# Altium PCB IRAUPS3.PcbDoc
Units mm, origin at the board's own origin, x right, y up, seen from the top; angles counter-clockwise.
Board outline 106 x 85.5 mm, 2 copper layers (Top Layer, Bottom Layer); 70 components, 43 nets, 167 pads, 0 vias.
Unrouted connection lines stored in the file: 123.
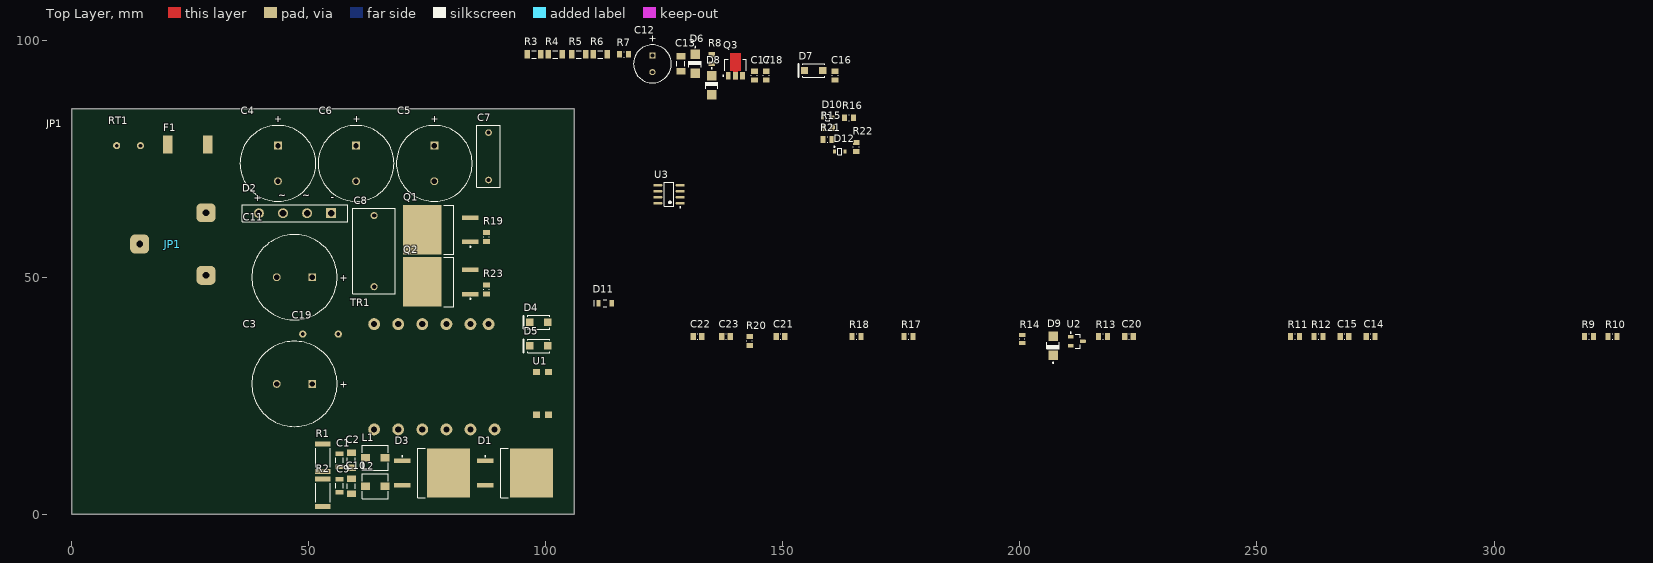
[diagram p0: Top Layer view]
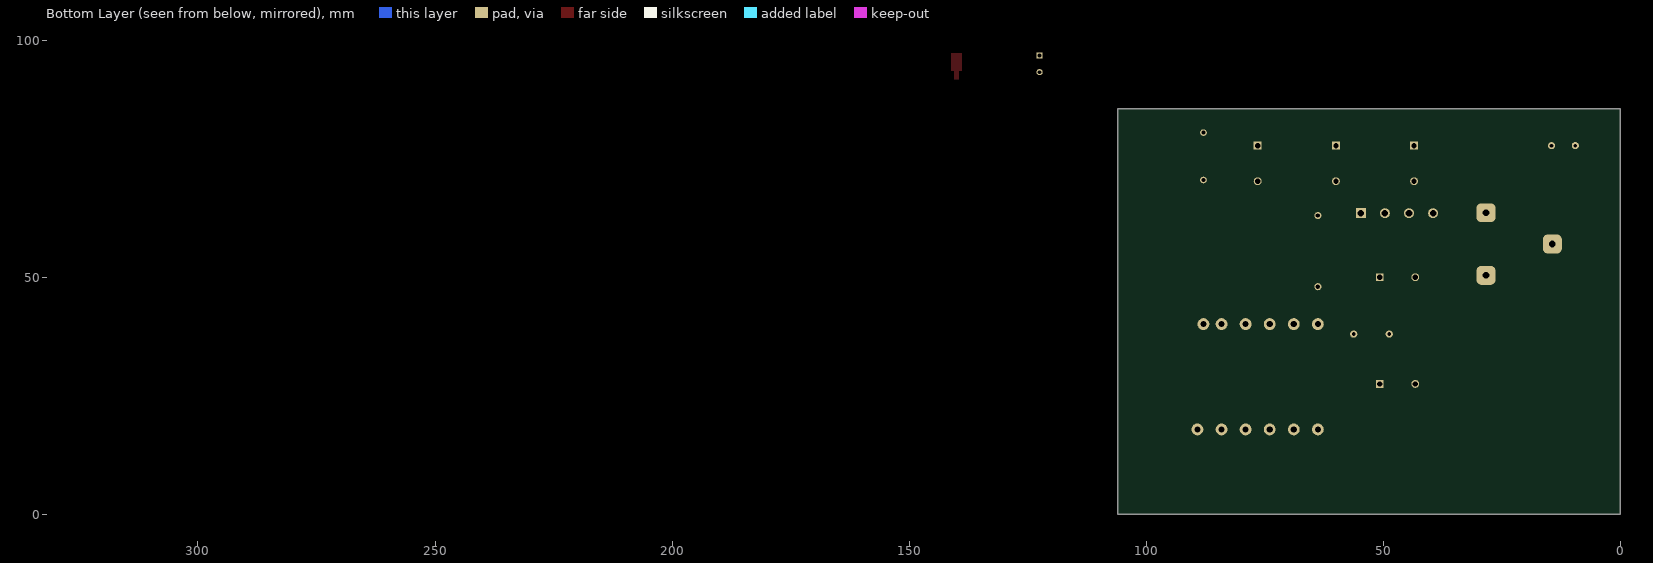
[diagram p1: Bottom Layer view, seen from below]

## Layer stack, top to bottom
Top Solder: solder mask 0.0102, Solder Resist, Dk 3.5
Top Layer: signal copper 0.0356
Dielectric 1: dielectric 0.32, FR-4, Dk 4.8
Bottom Layer: signal copper 0.0356
Bottom Solder: solder mask 0.0102, Solder Resist, Dk 3.5

## Board outline
0,0 0,85.5 106,85.5 106,0

## Design rules (kind name [scope] priority, off if disabled: settings)
Clearance [All] p1: gap=0.254 ignorepadtopadclearanceinfootprint=FALSE except(0: Arc-Hole Track-Hole SMDPad-Hole THPad-Hole Via-Hole Fill-Hole Poly-Hole Region-Hole Text-Hole)
Height [All] p1: minheight=0 maxheight=45 prefheight=12.7
PolygonConnect [All] p1: connectstyle=Relief reliefconductorwidth=0.254 reliefentries=4 polygonreliefangle="90 Angle" airgapwidth=0.254
RoutingVias [All] p1: holewidth=0.711 width=1.27 viastyle="Through Hole" minholewidth=0.711 minwidth=1.27 maxholewidth=0.711 maxwidth=1.27
SolderMaskExpansion [All] p1: expansion=0.102
Width [All] p1: maxlimit=0.254 minlimit=0.254 preferedwidth=0.254
29 further rules are at their usual default settings.

## Components (designator, comment, footprint, x,y, rotation, side; value= is the part's Value field where it differs from the comment)
C1 "CAP 1uF 100V 1206(3216)" CAPC1206(3216)190_L 56.5,11.4 r90 top value=1uF
C2 "CAP 100nF 100V 1206(3216)" CAPC1206(3216)150_M 59,11.4 r90 top value=100nF
C3 "35 Vdc, 4.7 mF" WCAP-ATG8_18x35.5x7.5 47,27.5 r0 top value="4.7 mF"
C4 "860241480001" WCAP-AT1H_16x35.5x7.5 43.5,74 r90 top value=100uF
C5 "860241480001" WCAP-AT1H_16x35.5x7.5 76.5,74 r90 top value=100uF
C6 "860241480001" WCAP-AT1H_16x35.5x7.5 60,74 r90 top value=100uF
C7 "400V DC, 100 nF" WCAP-FTBE_13x5x11 87.93,75.5 r90 top value="100 nF"
C8 "B32672L1223J000" CAP_RM15_W9L18 63.8,55.5 r270 top value=22nF
C9 "CAP 1uF 100V 1206(3216)" CAPC1206(3216)190_L 56.5,6 r90 top value=1uF
C10 "CAP 100nF 100V 1206(3216)" CAPC1206(3216)150_M 59,5.9 r90 top value=100nF
C11 "35 Vdc, 4.7 mF" WCAP-ATG8_18x35.5x7.5 47,50 r0 top value="4.7 mF"
C12 "860240474005" WCAP-AT1H_8x11.5x3.5 122.5,95 r90 top value=100uF
C13 "CAP 100nF 100V 1206(3216)" CAPC1206(3216)150_M 128.5,95 r90 top value=100nF
C14 "CAP 100nF 25V 0805(2012)" CAPC0805(2012)100_N 273.999,37.5 r0 top value=100nF
C15 "CAP 100nF 25V 0805(2012)" CAPC0805(2012)100_N 268.499,37.5 r0 top value=100nF
C16 "CAP 100nF 25V 0805(2012)" CAPC0805(2012)100_N 161.03,92.5 r90 top value=100nF
C17 "CAP 100nF 25V 0805(2012)" CAPC0805(2012)100_N 144,92.5 r90 top value=100nF
C18 "CAP 2.2uF 25V 0805(2012)" CAPC0805(2012)145_N 146.5,92.5 r90 top value=2.2uF
C19 "VY2472M49Y5US63V7" CAP_VY2472M49Y5US63V7 52.5,38 r0 top value=4700pF
C20 "CAP 1nF 25V 0805(2012)" CAPC0805(2012)100_N 222.999,37.5 r0 top value=1nF
C21 "CAP 470nF 25V 0805(2012)" CAPC0805(2012)100_N 149.5,37.5 r0 top value=470nF
C22 "CAP 2.2uF 25V 0805(2012)" CAPC0805(2012)145_N 132,37.5 r0 top value=2.2uF
C23 "CAP 2.2uF 25V 0805(2012)" CAPC0805(2012)145_N 138,37.5 r0 top value=2.2uF
D1 "STTH1002CG" TO-263_L 93.5,8.7 r0 top
D2 "GBU405" DIOD_BRIDGE_GBU 47.12,63.5 r180 top
D3 "STTH1002CG" TO-263_L 76,8.7 r0 top
D4 "ES1D" FAIR-SMA-2_V 98.5,40.5 r180 top
D5 "ES1D" FAIR-SMA-2_V 98.5,35.5 r180 top
D6 "1SMA5934BT3G" ONSC-SMA-2-403D-02_F_V 131.5,95 r270 top
D7 "ES1D" FAIR-SMA-2_V 156.5,93.6 r180 top
D8 "1SMA5927BT3G" ONSC-SMA-2-403D-02_F_V 135,90.5 r270 top
D9 "1SMA5927BT3G" ONSC-SMA-2-403D-02_F_V 206.999,35.5 r90 top
D10 "NSR0340HT1G" ONSC-SOD-323-2-477-02_V 159.5,83.65 r0 top
D11 "LL4148" DIOD-SOD-80 112.5,44.5 r180 top
D12 "NSR0340HT1G" ONSC-SOD-323-2-477-02_V 162,76.55 r0 top
F1 "UMT250" FUSE_UMT250 24.5,78 r180 top value=3.15A
JP1 "FN9226-3-02" CONN-FN9226-3-02 0,57 r0 top
L1 "744316560" "WE-HCI_5040_WE-PERM 2" 64,11.9 r270 top value=5.6uH
L2 "744316560" "WE-HCI_5040_WE-PERM 2" 64,5.9 r270 top value=5.6uH
Q1 "SIHB33N60EF-GE3" D2PAK_L 77.86,60 r180 top
Q2 "SIHB33N60EF-GE3" D2PAK_L 77.86,49 r180 top
Q3 "2SC5569-TD-E" ONSC-SOT-89-3-419AW_V 140,94.5 r0 top
R1 "2K2 5% 2512(6432)" RESC2512(6432)_L 53,11.9 r90 top value=2K2
R2 "2K2 5% 2512(6432)" RESC2512(6432)_L 53,4.5 r90 top value=2K2
R3 "100K 5% 1206(3216)" RESC1206(3216)_N 97.5,97 r180 top value=100K
R4 "100K 5% 1206(3216)" RESC1206(3216)_N 102,97 r180 top value=100K
R5 "100K 5% 1206(3216)" RESC1206(3216)_N 106.95,97 r180 top value=100K
R6 "100K 5% 1206(3216)" RESC1206(3216)_N 111.5,97 r180 top value=100K
R7 "27R 5% 0805(2012)" RESC0805(2012)_N 116.5,97 r0 top value=27R
R8 "10K 5% 0805(2012)" RESC0805(2012)_N 135,96.05 r90 top value=10K
R9 "10K 5% 0805(2012)" RESC0805(2012)_N 319.999,37.5 r0 top value=10K
R10 "47K 5% 0805(2012)" RESC0805(2012)_N 324.999,37.5 r0 top value=47K
R11 "4K7 5% 0805(2012)" RESC0805(2012)_N 257.999,37.5 r0 top value=4K7
R12 "27K 5% 0805(2012)" RESC0805(2012)_N 262.999,37.5 r0 top value=27K
R13 "2K7 5% 0805(2012)" RESC0805(2012)_N 217.499,37.5 r0 top value=2K7
R14 "1K5 5% 0805(2012)" RESC0805(2012)_L 200.499,37 r90 top value=1K5
R15 "22R 5% 0805(2012)" RESC0805(2012)_N 159.5,81.55 r0 top value=22R
R16 "6K2 1% 0805(2012)" RESC0805(2012)_N 164,83.65 r0 top value=6K2
R17 "6K2 1% 0805(2012)" RESC0805(2012)_N 176.5,37.5 r0 top value=6K2
R18 "10R 5% 0805(2012)" RESC0805(2012)_N 165.5,37.5 r0 top value=10R
R19 "4K7 5% 0805(2012)" RESC0805(2012)_N 87.5,58.5 r270 top value=4K7
R20 "16K 1% 0805(2012)" RESC0805(2012)_N 143,36.5 r90 top value=16K
R21 "22R 5% 0805(2012)" RESC0805(2012)_N 159.45,79.05 r0 top value=22R
R22 "10R 5% 0805(2012)" RESC0805(2012)_N 165.5,77.5 r90 top value=10R
R23 "4K7 5% 0805(2012)" RESC0805(2012)_N 87.5,47.45 r270 top value=4K7
RT1 "B57235S0509M000" RES_TH_9.5mm 12,77.75 r0 top
TR1 "019-7340-01R" TRAN_019-7340-01R 76.5,29 r270 top
U1 "LTV817S" SMD-4 99.295,25.5 r0 top
U2 "TL431" DBZ0003A_M 211.999,36.5 r0 top
U3 "IRS27952" SOIC8_L 126,67.5 r180 top

## Footprints (in the part's own frame and the unit in brackets; to place one, negate y for a bottom-side part, rotate by r counter-clockwise, add the part's x,y. Pads: shape width x height; smd on the part's side, far side on the other; paste and mask are expansions set on the pad)
CAP_RM15_W9L18 [mm] "CAP RM15 width 9, height 17.5, length 18"
  round 1.5 hole 0.9: 1(-7.5,0) 2(7.5,0)
  silkscreen extent -9,-4.5 9,4.5, body extent -9,-4.5 9,4.5, height 17.5
CAP_VY2472M49Y5US63V7 [mm] "X,Y CAP"
  round 1.524 hole 0.8: 1(-3.75,0) 2(3.75,0)
  body extent -6.35,-2.5 6.15,2.5, height 16.24
CAPC0805(2012)100_N [mm] "Chip Capacitor, Body 2.0x1.2mm, Height 1.0mm, IPC Medium Density"
  rect 1.15x1.45 smd: 1(-0.9,0) 2(0.9,0)
  silkscreen extent -0.05,-0.62 0.05,0.63, body extent -1.1,-0.72 1.1,0.73, height 1
CAPC0805(2012)145_N [mm] "Chip Capacitor, Body 2.0x1.2mm, Height 1.45mm, IPC Medium Density"
  rect 1.15x1.45 smd: 1(-0.9,0) 2(0.9,0)
  silkscreen extent -0.05,-0.62 0.05,0.63, body extent -1.1,-0.72 1.1,0.73, height 1.45
CAPC1206(3216)150_M [mm] "Chip Capacitor, Body 3.2x1.6mm, Height 1.5mm, IPC Low Density"
  rect 1.35x1.9 smd: 1(-1.6,0) 2(1.6,0)
  silkscreen extent -0.55,-0.85 0.55,0.85, body extent -1.7,-0.9 1.7,0.9, height 1.5
CAPC1206(3216)190_L [mm] "Chip Capacitor, Body 3.2x1.6mm, Height 1.9mm, IPC High Density"
  rect 0.95x1.7 smd: 1(-1.4,0) 2(1.4,0)
  silkscreen extent -0.55,-0.75 0.55,0.75, body extent -1.7,-0.9 1.7,0.9, height 1.9
CONN-FN9226-3-02 [mm] "IEC Inlet"
  rrect50% 4x4 hole 1.4: L(28.35,-6.6) N(28.35,6.6) PE(14.35,0)
  body extent -5.75,-24.1 35.2,23.9, height 25.41
D2PAK_L [mm] "D2-PAK, 4-Leads, Body 9.2x10.2mm, Pitch 2.54mm, Lead Span 15.4mm, IPC High Density"
  rect 3.5x0.95 smd: 1(-6.25,2.54) 3(-6.25,-2.54)
  rect 8.2x10.45 smd: 4(3.9,0)
  silkscreen extent -6.38,-5.2 -0.6,5.2, body extent -7.46,-4.91 7.14,4.91, height 4.22
DBZ0003A_M [mm] "SOT23, 3-Leads, Body 3.04x1.4mm, Pitch 0.95mm, IPC Low Density"
  rrect15% 1.2x0.65 smd: 1(-1.3,0.95) 2(-1.3,-0.95) 3(1.3,0)
  silkscreen extent -1.42,-1.5 0.7,1.95, body extent -1.26,-1.46 1.26,1.46, height 0.96
DIOD-SOD-80 [mm]
  rect 0.9x1.4 smd: 1(-1.4,0) 2(1.4,0)
  silkscreen extent -0.4,-0.77 2.3,0.77, body extent -1.85,-0.8 1.85,0.8, height 1.63
DIOD_BRIDGE_GBU [mm] "BRIDGE RECTIFIER"
  rect 2.1x2.1 hole 1.4: 1(-7.62,0)
  round 2.1 hole 1.4: 2(-2.54,0) 3(2.54,0) 4(7.62,0)
  silkscreen extent -11.15,-1.78 11.15,1.78, body extent -11.43,-1.9 11.43,1.91, height 12.5
FAIR-SMA-2_V [mm] "Molded Diode, 2-Leads, Body 4.292x2.693mm"
  rect 1.555x1.57 smd: 1(-1.915,0) 2(1.915,0)
  silkscreen extent -2.3,-1.45 3.19,1.45, body extent -2.15,-1.35 2.15,1.35, height 2.44
FUSE_UMT250 [mm] "Fuse UMT250"
  rect 2x3.75 smd: 1(-4.25,0) 2(4.25,0)
  body extent -5.45,-1.5 5.45,1.5, height 3.01
ONSC-SMA-2-403D-02_F_V [mm] "Molded, 2-Leads, Body 4.32x2.6mm"
  rect 2x2 smd: 1(-2,0) 2(2,0)
  silkscreen extent -3.67,-1.3 0.74,1.3, body extent -2.16,-1.3 2.16,1.3, height 2.2
ONSC-SOD-323-2-477-02_V [mm] "SOD, 2-Leads, Body 1.7x1.25mm"
  rect 0.63x0.83 smd: 1(-1.115,0) 2(1.115,0)
  silkscreen extent -1.24,-0.67 0.4,1.09, body extent -0.85,-0.63 0.85,0.63, height 1.06
ONSC-SOT-89-3-419AW_V [mm] "SOT89, 3-Leads, Body 4.5x2.5mm, Pitch 1.5mm"
  rect 1x1.5 smd: 1(-1.5,-2) 2(0,-2) 3(1.5,-2)
  Top Layer region: -0.5,-0.95 -1.1,-0.95 -1.1,2.75 1.1,2.75 1.1,-0.95 0.5,-0.95 0.5,-2.75 -0.5,-2.75
  silkscreen extent -2.67,-2.12 2.25,1.5, body extent -2.25,-1 2.25,1.5, height 1.6
RES_TH_9.5mm [mm] "Thermistor"
  round 1.5 hole 0.8: 1(-2.5,0) 2(2.5,0)
  body extent -4.5,-3.75 4.5,3.75, height 14.5
RESC0805(2012)_L [mm] "Chip Resistor, Body 2.0x1.3mm, IPC High Density"
  rect 0.85x1.3 smd: 1(-0.85,0) 2(0.85,0)
  silkscreen extent -0.05,-0.55 0.05,0.55, body extent -1.1,-0.67 1.1,0.68, height 0.7
RESC0805(2012)_N [mm] "Chip Resistor, Body 2.0x1.3mm, IPC Medium Density"
  rect 1.05x1.4 smd: 1(-0.95,0) 2(0.95,0)
  silkscreen extent -0.05,-0.6 0.05,0.6, body extent -1.1,-0.67 1.1,0.68, height 0.7
RESC1206(3216)_N [mm] "Chip Resistor, Body 3.2x1.6mm, IPC Medium Density"
  rect 1.15x1.8 smd: 1(-1.45,0) 2(1.45,0)
  silkscreen extent -0.5,-0.8 0.5,0.8, body extent -1.67,-0.87 1.67,0.87, height 0.75
RESC2512(6432)_L [mm] "Chip Resistor, Body 6.4x3.2mm, IPC High Density"
  rect 1.05x3.25 smd: 1(-2.9,0) 2(2.9,0)
  silkscreen extent -2,-1.52 2,1.53, body extent -3.25,-1.7 3.25,1.7, height 0.75
SMD-4 [mm] "Opto coupler"
  rect 1.5x1.3 smd: 1(-1.27,-4.5) 2(1.27,-4.5) 3(1.27,4.5) 4(-1.27,4.5)
  body extent -2.3,-5.08 2.3,5.08, height 3.51
SOIC8_L [mm] "SOIC, 8-Leads, Body 4.9x3.9mm, Pitch 1.27mm, IPC High Density"
  oval 1.9x0.6 smd: 1(-2.35,1.905) 2(-2.35,0.635) 3(-2.35,-0.635) 4(-2.35,-1.905) 5(2.35,-1.905) 6(2.35,-0.635) 7(2.35,0.635) 8(2.35,1.905)
  silkscreen extent -2.48,-2.5 1,2.88, body extent -3.08,-2.5 3.08,2.5, height 2
TO-263_L [mm] "D2-PAK, 4-Leads, Body 9.2x10.2mm, Pitch 2.54mm, Lead Span 15.4mm, IPC High Density"
  rect 3.5x0.95 smd: 1(-6.25,2.54) 3(-6.25,-2.54)
  rect 9x10.35 smd: 4(3.5,0)
  silkscreen extent -6.37,-5.2 -1.4,5.2, body extent -7.46,-4.91 7.14,4.91, height 4.22
TRAN_019-7340-01R [mm] "Precision inc. IRAUPS3 LLC Transformer"
  round 2.5 hole 1.3: 1(-11.113,11.43) 2(-11.113,7.62) 3(-11.112,2.54) 4(-11.112,-2.54) 5(-11.113,-7.62) 6(-11.113,-12.7) 7(11.113,-12.7) 8(11.113,-7.62) 9(11.112,-2.54) 10(11.112,2.54) 11(11.113,7.62) 12(11.113,12.7)
  body extent -14.1,-18 14.1,18, height 28.61
WCAP-AT1H_8x11.5x3.5 [mm] "Aluminium Electrolytic Radial THD Capacitors, §¶8x11.5mm"
  rect 1.3x1.3 hole 0.8: 1(1.75,0)
  round 1.3 hole 0.8: 2(-1.75,0)
  silkscreen extent -4,-4 4,4, body extent -3.99,-4 4,4, height 11.76
WCAP-AT1H_16x35.5x7.5 [mm] "Aluminium Electrolytic Radial THD Capacitors, §¶16x35.5mm"
  rect 1.65x1.65 hole 1.1: 1(3.75,0)
  round 1.65 hole 1.1: 2(-3.75,0)
  silkscreen extent -8,-8 8,8, body extent -7.99,-8 8,8, height 35.76
WCAP-ATG8_18x35.5x7.5 [mm] "Aluminum Electrolytic Capacitors, 18x35.5mm"
  rect 1.65x1.65 hole 1.1: 1(3.75,0)
  round 1.65 hole 1.1: 2(-3.75,0)
  silkscreen extent -9,-9 9,9, body extent -8.99,-9 9,9, height 35.81
WCAP-FTBE_13x5x11 [mm] "Film Capacitors, 13x5x11mm"
  round 1.4 hole 0.9: 1(-5,0) 2(5,0)
  silkscreen extent -6.5,-2.5 6.5,2.5, body extent -6.5,-2.5 6.5,2.5, height 11.05
"WE-HCI_5040_WE-PERM 2" [mm] "SMD Flat Wire High Current Inductor, size 5040"
  rect 1.6x1.9 smd: 1(0,2.05) 2(0,-2.05)
  silkscreen extent -2.65,-2.75 2.65,2.75, body extent -2.65,-2.79 2.65,2.79, height 4

## Part data
C1 C9: library part CMP-1037-04729-1, "CAP 1uF 100V ±20% 1206 (3216 Metric) Thickness 1.9mm SMD", Case-EIA=1206, Case-Metric=3216, Rated Voltage="100 V", Tolerance=±20%, Max Thickness="1.9 mm", Technology=SMT
C2 C10 C13: library part CMP-1037-04216-1, "CAP 100nF 100V ±20% 1206 (3216 Metric) Thickness 1.45mm SMD", Case-EIA=1206, Case-Metric=3216, Rated Voltage="100 V", Tolerance=±20%, Max Thickness="1.45 mm", Technology=SMT
C3 C11: library part 860010581025, "WCAP-ATG8 Aluminum Electrolytic Capacitors, 18x35.5mm, 35 Vdc, 4.7 mF", Operating Temperature="-40 °C up to +85 °C", Rated Voltage="35 Vdc", ComponentLink1Description=Manufacturer, ComponentLink1URL=http://www.we-online.de, ComponentLink2Description=Datasheet, ComponentLink2URL=http://katalog.we-online.de/pbs/datasheet/860010581025.pdf, Life Cycle=2000h, Part Number=860010581025, Published Date="Sep. 2017", Publisher="Wurth Elektronik", Size=18x35.5mm
C4 C5 C6: "WCAP-AT1H Aluminum Electrolytic Capacitors, size ?16x35.5mm, 450V DC, 100uF", Operating Temperature="-25 °C up to +105 °C", Rated Voltage="450V DC", ComponentLink1Description=Manufacturer, ComponentLink1URL=http://www.we-online.de, ComponentLink2Description=Datasheet, ComponentLink2URL=http://katalog.we-online.de/pbs/datasheet/860241480001.pdf, Life Cycle=5000h, Part Number=860241480001, Published Date="June 2017", Publisher="Wurth Elektronik", Size=?16x35.5mm
C7: library part 890283423001CS, "WCAP-FTBE Film Capacitors, 13x5x11mm, 400V DC, 100 nF", Operating Temperature="-40 °C to +85 °C", Rated Voltage="400V DC", ComponentLink1Description=Manufacturer, ComponentLink1URL=http://www.we-online.de, ComponentLink2Description=Datasheet, ComponentLink2URL=http://katalog.we-online.de/pbs/datasheet/890283423001CS.pdf, Part Number=890283423001CS, Published Date="Sep. 2017", Publisher="Wurth Elektronik", Size=13x5x11mm
C8: library part CAP_MKP_B32672L1223J000, "0.022µF Film Capacitor 600V 1600V (1.6kV) Polypropylene (PP), Metallized Radial", Voltage=1.6kV, DigiKey=495-3217-ND, Farnell=2469009, MPN=B32672L1223J000, PackageReference=RM15
C12: "WCAP-AT1H Aluminum Electrolytic Capacitors, size ?8x11.5mm, 25V DC, 100uF", Operating Temperature="-40 °C up to +105 °C", Rated Voltage="25V DC", ComponentLink1Description=Manufacturer, ComponentLink1URL=http://www.we-online.de, ComponentLink2Description=Datasheet, ComponentLink2URL=http://katalog.we-online.de/pbs/datasheet/860240474005.pdf, Life Cycle=8000h, Part Number=860240474005, Published Date="June 2017", Publisher="Wurth Elektronik", Size=?8x11.5mm
C14 C15 C16 C17: library part CMP-1036-04409-1, "CAP 100nF 25V ±5% 0805 (2012 Metric) Thickness 1mm SMD", Case-EIA=0805, Case-Metric=2012, Rated Voltage="25 V", Tolerance=±5%, Max Thickness="1 mm", Technology=SMT
C18 C22 C23: library part CMP-1036-04837-1, "CAP 2.2uF 25V ±10% 0805 (2012 Metric) Thickness 1.45mm SMD", Case-EIA=0805, Case-Metric=2012, Rated Voltage="25 V", Tolerance=±10%, Max Thickness="1.45 mm", Technology=SMT
C19: library part CAP_VY2_4700, "4700pF ±20% 440VAC Ceramic Capacitor Y5U (E) Radial, Disc", Voltage=440VAC, DigiKey=BC2359-ND, Farnell=1902233, MPN=VY2472M49Y5US63V7, PackageReference=THD
C20: library part CMP-1036-02968-1, "CAP 1nF 25V ±10% 0805 (2012 Metric) Thickness 1mm SMD", Case-EIA=0805, Case-Metric=2012, Rated Voltage="25 V", Tolerance=±10%, Max Thickness="1 mm", Technology=SMT
C21: library part CMP-1036-04646-1, "CAP 470nF 25V ±10% 0805 (2012 Metric) Thickness 1mm SMD", Case-EIA=0805, Case-Metric=2012, Rated Voltage="25 V", Tolerance=±10%, Max Thickness="1 mm", Technology=SMT
D1 D3: library part DIODE-STTH1002CG, "Diode Array 1 Pair Common Cathode Schottky 60V 15A Through Hole TO-220-3", MPN=STTH1002CG
D2: library part DIOD_BRIDGE_GBU405, "IC RECT BRIDGE 0.5A 600V 4SOIC", Farnell=4084780, MPN=GBU405
D4 D5 D7: library part CMP-2000-06230-1, "Fairchild ES1D Diode, 200 V, 1 A, -50 to 150 degC, 2-Pin SMA, RoHS, Cut Tape", Average Rectified Current-Max=1A, Forward Voltage=0.92V, Manufacturer="Fairchild Semiconductor", Package Description="2-Pin SMA, Body 4.292 x 2.693 mm", Package Reference=SMA-2, Power Dissipation=1470mW, Reverse Current-Max=5µA, Reverse Voltage-Max [Vrrm]=200V, Datasheet URL=https://datasheet.ciiva.com/5739/575529-5739201.pdf, Datasheet Version="Rev. C1", IF=1A, Manufacturer URL=https://www.fairchildsemi.com/, Mounting Technology=SurfaceMount, PartNumber=ES1D, Reverse Recovery Time-Max=15ns, VRRM=200V
D6: library part CMP-1060-00064-1, "1.5 W Zener Voltage Regulator, 2-Pin SMA, Pb-Free, Tape and Reel", Manufacturer="On Semiconductor", ComponentLink1Description="Manufacturer URL", ComponentLink1URL=http://www.onsemi.com/, ComponentLink2Description=Datasheet, ComponentLink2URL=http://www.onsemi.com/pub_link/Collateral/1SMA5913BT3-D.PDF, ComponentLink3Description="Package Specification", ComponentLink3URL=http://www.onsemi.com/pub_link/Collateral/1SMA5913BT3-D.PDF, DatasheetVersion="Rev. 8", Mounting Technology="Surface Mount", PackageDescription="2-Pin Small Molded Package, J-Bend Lead, Body 2.605 x 4.315 mm", PackageReference=SMA-2-403D-02_F, PackageVersion="Rev. F, 11/2008", Packing="Tape and Reel", PartNumber=1SMA5934BT3G, RoHS=Pb-Free, VZ Typ (V)=24
D8 D9: library part CMP-1060-00103-1, "1.5 W Zener Voltage Regulator, 2-Pin SMA, Pb-Free, Tape and Reel", Manufacturer="On Semiconductor", ComponentLink1Description="Manufacturer URL", ComponentLink1URL=http://www.onsemi.com/, ComponentLink2Description=Datasheet, ComponentLink2URL=http://www.onsemi.com/pub_link/Collateral/1SMA5913BT3-D.PDF, ComponentLink3Description="Package Specification", ComponentLink3URL=http://www.onsemi.com/pub_link/Collateral/1SMA5913BT3-D.PDF, DatasheetVersion="Rev. 8", Mounting Technology="Surface Mount", PackageDescription="2-Pin Small Molded Package, J-Bend Lead, Body 2.605 x 4.315 mm", PackageReference=SMA-2-403D-02_F, PackageVersion="Rev. F, 11/2008", Packing="Tape and Reel", PartNumber=1SMA5927BT3G, RoHS=Pb-Free, VZ Typ (V)=12
D10 D12: library part CMP-1055-00472-1, "Schottky Barrier Diode, 2-Pin SOD-323, Pb-Free, Tape and Reel", Manufacturer="On Semiconductor", ComponentLink1Description="Manufacturer URL", ComponentLink1URL=http://www.onsemi.com/, ComponentLink2Description=Datasheet, ComponentLink2URL=http://www.onsemi.cn/pub_link/Collateral/NSR0340H-D.PDF, ComponentLink3Description="Package Specification", ComponentLink3URL=http://www.onsemi.com/pub_link/Collateral/477-02.PDF.1, Configuration=Single, DatasheetVersion="Rev. 1", IFSM Max (A)=1, Mounting Technology="Surface Mount", PackageDescription="2-Pin SOD, Body 1.7 x 1.25 mm", PackageReference=SOD-323-2-477-02, PackageVersion="Rev. H, 03/2007", Packing="Tape and Reel", PartNumber=NSR0340HT1G, RoHS=TRUE
D11: library part DIOD_GP_LL4148, "DIODE GEN PURP 100V 200MA SOD80", Code_JEDEC=SOD-80, DigiKey=LL4148FSTR-ND, Farnell=2101203, MPN=LL4148
F1: library part FUSE_UMT250-3.15A, "Fuse", MPN=3403.0171.11, DigiKey=486-1252-ND, ELFA=13322670, Farnell=1221095
JP1: library part CONN_FN9226-3-02, "Power Entry Connector Receptacle, Male Blades IEC 320-C14 Panel Mount, Flange; Through Hole, Right Angle", MPN=FN9226-3-02
L1 L2: "WE-HCI SMD Flat Wire High Current Inductor, size 5040, 4.5A, 5.6uH", Rated Current=4.5A, ComponentLink1Description=Manufacturer, ComponentLink1URL=http://www.we-online.de, ComponentLink2Description=Datasheet, ComponentLink2URL=http://katalog.we-online.de/pbs/datasheet/744316560.pdf, Material="WE-PERM 2", Part Number=744316560, Published Date="July 2017", Publisher="Wurth Elektronik", Size=5040
Q1 Q2: library part TRAN_SIHB33N60EF-GE3, "N-Channel 600V 33A (Tc) 278W (Tc) Surface Mount D²PAK (TO-263)", MPN=SIHB33N60EF-GE3
Q3: library part CMP-1050-00111-1, "Bipolar Transistor, 50 V, 7 A, Low VCE(sat), NPN Single, 3-Pin SOT-89, Pb-Free, Tape and Reel", Manufacturer="On Semiconductor", ComponentLink1Description="Manufacturer URL", ComponentLink1URL=http://www.onsemi.com/, ComponentLink2Description=Datasheet, ComponentLink2URL=http://www.onsemi.com/pub_link/Collateral/EN6309-D.PDF, ComponentLink3Description="Package Specification", ComponentLink3URL=http://www.onsemi.com/pub_link/Collateral/419AW.PDF, hFE Max=560, hFE Min=200, IC Continuous (A)=7, Mounting Technology="Surface Mount", PackageDescription="3-Pin Small Outline Transistor, Body 4.5 x 2.5 mm, Pitch 1.5 mm", PackageReference=SOT-89-3-419AW, PackageVersion="Rev. O, 04/2012", Packing="Tape and Reel", PartNumber=2SC5569-TD-E, Polarity=NPN, RoHS=TRUE, V(BR)CEO Min (V)=50
R1 R2: library part CMP-1018-00082-1, "2K2 1W 5% 2512 (6432 Metric)  SMD", Case-EIA=2512, Case-Metric=6432, Power="1 W", Tolerance="5 %", Technology=SMT
R3 R4 R5 R6: library part CMP-1014-00122-1, "100K 0.25W 5% 1206 (3216 Metric)  SMD", Case-EIA=1206, Case-Metric=3216, Power="0.25 W", Tolerance="5 %", Technology=SMT
R7: library part CMP-1013-00036-1, "27R 0.125W 5% 0805 (2012 Metric)  SMD", Case-EIA=0805, Case-Metric=2012, Power="0.125 W", Tolerance="5 %", Technology=SMT
R8 R9: library part CMP-1013-00098-1, "10K 0.125W 5% 0805 (2012 Metric)  SMD", Case-EIA=0805, Case-Metric=2012, Power="0.125 W", Tolerance="5 %", Technology=SMT
R10: library part CMP-1013-00114-1, "47K 0.125W 5% 0805 (2012 Metric)  SMD", Case-EIA=0805, Case-Metric=2012, Power="0.125 W", Tolerance="5 %", Technology=SMT
R11 R19 R23: library part CMP-1013-00090-1, "4K7 0.125W 5% 0805 (2012 Metric)  SMD", Case-EIA=0805, Case-Metric=2012, Power="0.125 W", Tolerance="5 %", Technology=SMT
R12: library part CMP-1013-00108-1, "27K 0.125W 5% 0805 (2012 Metric)  SMD", Case-EIA=0805, Case-Metric=2012, Power="0.125 W", Tolerance="5 %", Technology=SMT
R13: library part CMP-1013-00084-1, "2K7 0.125W 5% 0805 (2012 Metric)  SMD", Case-EIA=0805, Case-Metric=2012, Power="0.125 W", Tolerance="5 %", Technology=SMT
R14: library part CMP-1013-00078-1, "1K5 0.125W 5% 0805 (2012 Metric)  SMD", Case-EIA=0805, Case-Metric=2012, Power="0.125 W", Tolerance="5 %", Technology=SMT
R15 R21: library part CMP-1013-00034-1, "22R 0.125W 5% 0805 (2012 Metric)  SMD", Case-EIA=0805, Case-Metric=2012, Power="0.125 W", Tolerance="5 %", Technology=SMT
R16 R17: library part CMP-1013-00599-1, "6K2 0.125W 1% 0805 (2012 Metric)  SMD", Case-EIA=0805, Case-Metric=2012, Power="0.125 W", Tolerance="1 %", Technology=SMT
R18 R22: library part CMP-1013-00026-1, "10R 0.125W 5% 0805 (2012 Metric)  SMD", Case-EIA=0805, Case-Metric=2012, Power="0.125 W", Tolerance="5 %", Technology=SMT
R20: library part CMP-1013-00644-1, "16K 0.125W 1% 0805 (2012 Metric)  SMD", Case-EIA=0805, Case-Metric=2012, Power="0.125 W", Tolerance="1 %", Technology=SMT
RT1: library part RES_B57235S0509M000, "Inrush Current Limiter 5 Ohms ±20% 4.2A 0.374\" (9.50mm)", MPN=B57235S0509M000
TR1: library part TRANS_019-7340-01R, "LLC transformer", MPN=019-7340-01R
U1: library part OPTO-LTV817S, "Optoisolator Transistor Output 5000Vrms 1 Channel 4-SMD", MPN=LTV817S, PackageReference=SOT-23B, Published=8-Jun-2000
U2: library part CMP-0366-01226-2, "Automotive Catalog Adjustable Precision Shunt Regulator, 34 ppm / degC, 100 mA, -40 to 125 degC, 3-pin SOT-23 (DBZ), Green (RoHS & no Sb/Br)", Manufacturer="Texas Instruments", PartNumber=TL431AQDBZRQ1, Rating=Automotive, Temp Coeff(Typ)(ppm/ degree C)=34, Code_JEDEC=TO-236, ComponentLink1Description="Manufacturer URL", ComponentLink1URL=http://www.ti.com/, ComponentLink2Description=Datasheet, ComponentLink2URL=http://www.ti.com/general/docs/lit/getliterature.tsp?genericPartNumber=TL431A-Q1&fileType=pdf, ComponentLink3Description="Package Specification", ComponentLink3URL=http://www.ti.com/litv/pdf/mpds108a, DatasheetVersion=SGLS302C, Eco-Plan="Green (RoHS & no Sb/Br)", Initial Accuracy @ 25/deg C(%)=1, Iout/Iz(Max)(mA)=100, Min Iz for Regulation(uA)=600, Mounting Technology="Surface Mount", PackageDescription="3-Pin Plastic Small Outline, Body 2.92 x 1.3 mm, Pitch 0.95 mm", PackageReference=DBZ0003A, PackageVersion=4203227/B, SubFamily="Shunt Voltage Reference", VO Adj(Max)(V)=36, VO Adj(Min)(V)=2.495
U3: library part IC-PMIC-IRS27952, "IC REG CTRLR BUCK/HALF-BRG 8SOIC", MPN=IRS27952SPBF, DigiKey=IRS27952SPBF-ND, Farnell=1866043

## Nets (pads, with @x,y where several pads share a name; then routed paths per layer and width w, separated by ;. In a path a pad name is that pad's centre, name@x,y a point inside that pad or via, vN(x,y) a via of type N, cw(c..) or ccw(c..) an arc to the next point about the centre after c; other vN are vias at no path point)
+B: C1.2 C2.2 L1.2 R1.2 R10.2
+V: C4.1 C5.1 C6.1 C7.2 D2.4 Q1.4 R3.2
-B: C9.1 C10.1 D9.2 L2.2 R2.1 R14.2 U2.3
GND: C4.2 C5.2 C6.2 C7.1 C8.1 C12.2 C13.1 C14.1 C17.1 C18.1 C19.1 C21.1 C22.1 C23.1 D2.1 D6.2 D8.2 Q2.3 R20.1 R23.1 TR1.2 U1.3 U3.4
HI: Q1.1 R15.2 R18.2 R19.2
LO: Q2.1 R21.2 R22.2 R23.2
NetC3_1: C3.1 D1.4 L1.1
NetC8_2: C8.2 TR1.6
NetC11_2: C11.2 L2.1 TR1.7
NetC12_1: C12.1 C13.2 D6.1 Q3.2 R7.2 R8.2
NetC14_2: C14.2 D8.1 Q3.1 R8.1
NetC15_1: C15.1 R12.2
NetC15_2: C15.2 C20.2 R10.1 R14.1 U2.2
NetC20_1: C20.1 R11.1 R12.1 U1.2 U2.1
NetC21_2: C21.2 U3.3
NetC22_2: C22.2 C23.2 D11.1 R17.1
NetD1_1: D1.1 TR1.11
NetD1_3: D1.3 TR1.12
NetD2_2: D2.2 F1.2
NetD2_3: D2.3 RT1.1
NetD3_1: D3.1 TR1.8
NetD3_3: D3.3 TR1.9
NetD4_1: D4.1 D5.1 R6.1 R7.1
NetD4_2: D4.2 TR1.1
NetD5_2: D5.2 TR1.3
NetD9_1: D9.1 R9.1 R11.2 R13.2
NetD10_1: D10.1 R15.1 U3.7
NetD10_2: D10.2 R18.1
NetD11_2: D11.2 R16.2 R17.2 R20.2 U3.2
NetD12_1: D12.1 R21.1 U3.5
NetD12_2: D12.2 R22.1
NetF1_1: F1.1 JP1.L
NetJP1_N: JP1.N RT1.2
NetR3_1: R3.1 R4.2
NetR4_1: R4.1 R5.2
NetR5_1: R5.1 R6.2
NetR13_1: R13.1 U1.1
NetR16_1: R16.1 U1.4
PE: JP1.PE
SGND: C1.1 C2.1 C3.2 C9.2 C10.2 C11.1 C19.2 D3.4 R1.1 R2.2 R9.2 TR1.10
SW: C16.1 Q1.3 Q2.4 R19.1 TR1.4 U3.6
VB: C16.2 D7.1 U3.8
VCC: C17.2 C18.2 D7.2 Q3.3 U3.1
pads on no net: TR1.5

## Silkscreen, mask and mechanical layers (free items; w line width, h text height)
Mechanical 1:
  the board outline again, w0.254

## Text inside footprints (layer, text, board x,y; h text height)
C3: Top Overlay "+" at 56.5,26.7 h1.5
C4: Top Overlay "+" at 44.237,82.475 h1.5 r90
C5: Top Overlay "+" at 77.237,82.475 h1.5 r90
C6: Top Overlay "+" at 60.737,82.475 h1.5 r90
C11: Top Overlay "+" at 56.5,49.2 h1.5
C12: Top Overlay "+" at 123.237,99.475 h1.5 r90
D2: Top Overlay "+" at 40.135,67.31 h1.5 r180; Top Overlay "-" at 55.375,67.31 h1.5 r180; Top Overlay "~" at 45.215,67.945 h1.5 r180; Top Overlay "~" at 50.295,67.945 h1.5 r180